# Altium PCB Copy of DAQ.PcbDoc (part 1 of 2)
Units mil, origin at the board's own origin, x right, y up, seen from the top; angles counter-clockwise.
Board outline 2793.12 x 2548.73 mil, 4 copper layers (Top Layer, GND, 3V3, Bottom Layer), stack 23.756 mil thick; 148 components, 93 nets, 486 pads, 25 vias.
Unrouted connection lines stored in the file: 356.
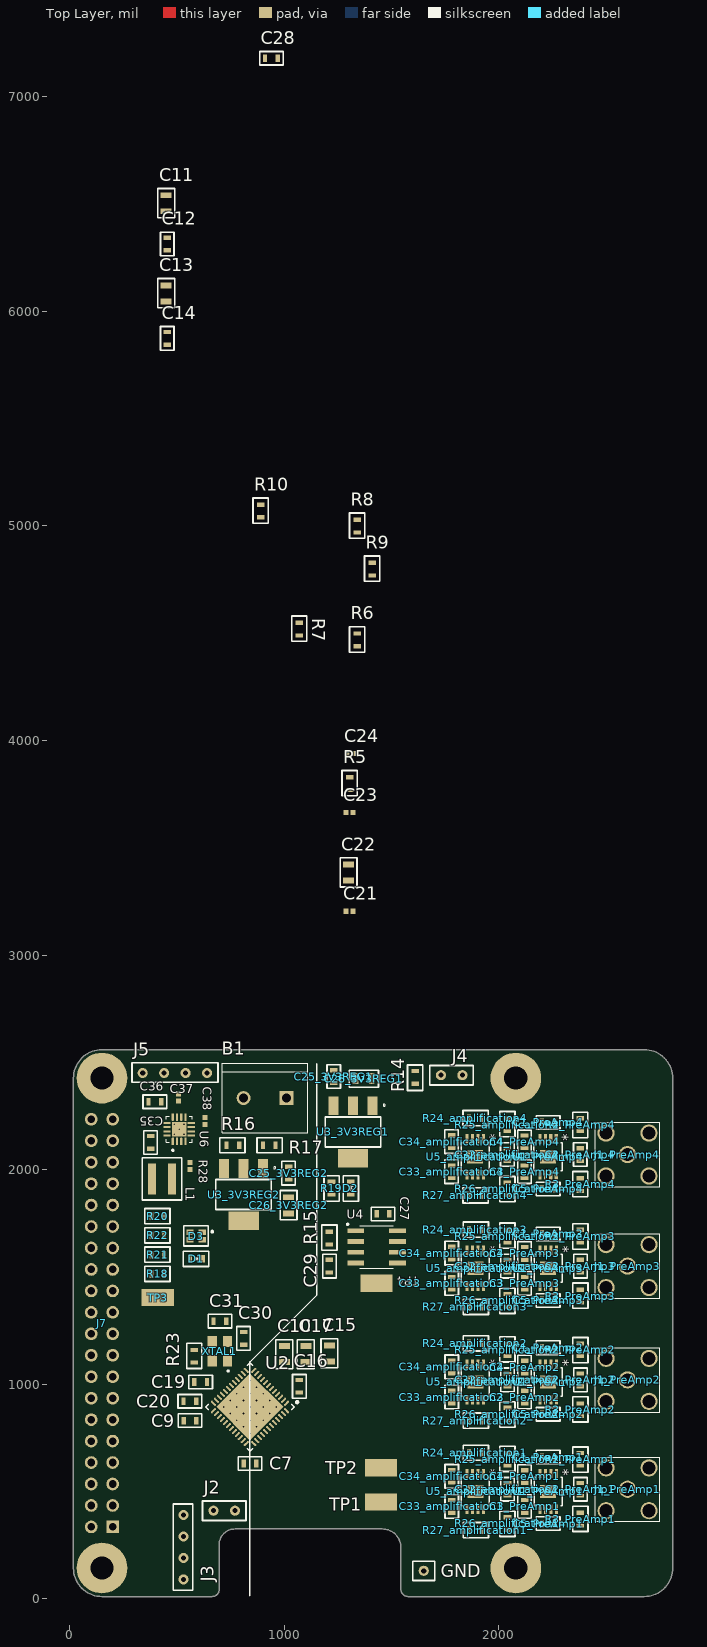
[diagram p0: Top Layer view]
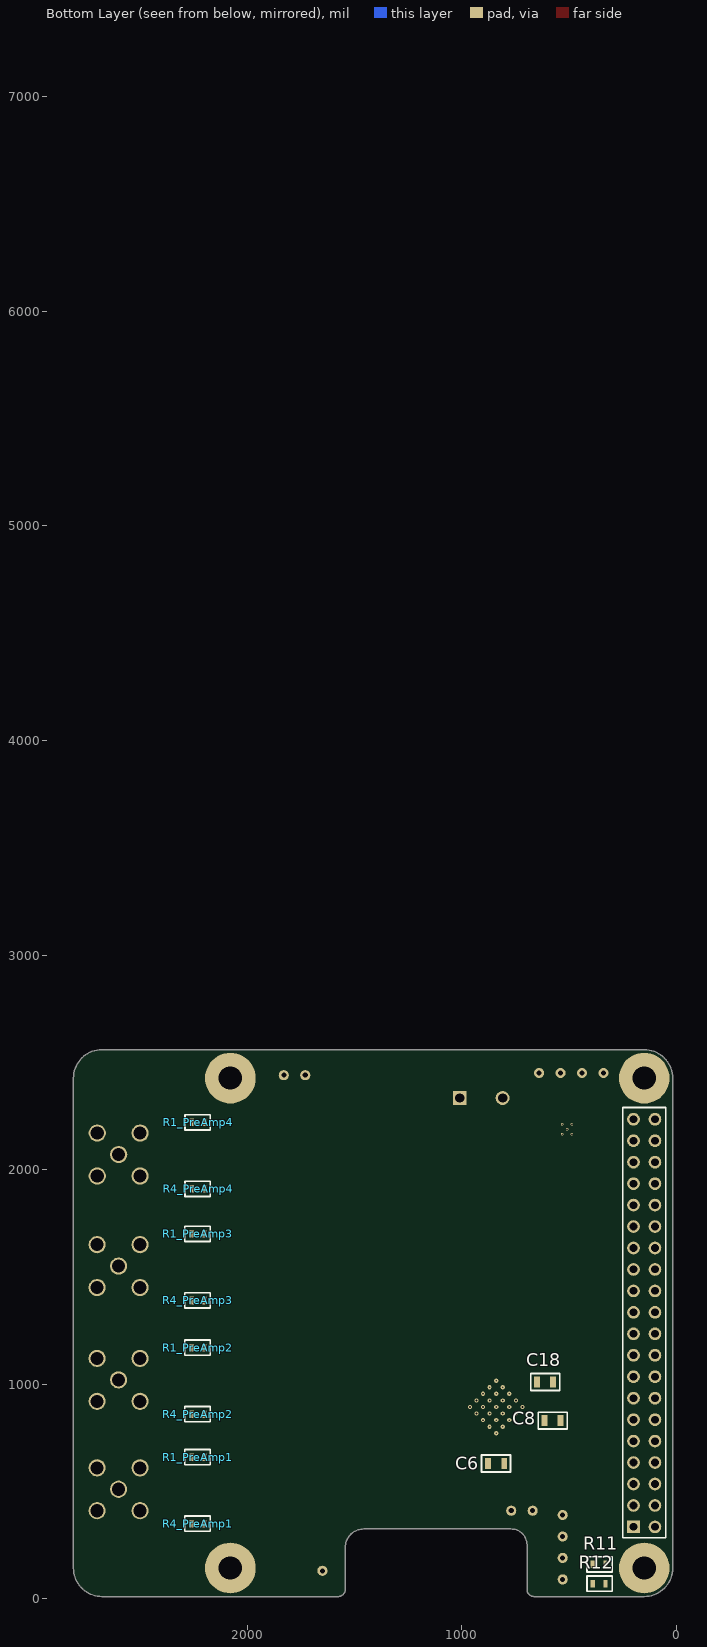
[diagram p1: Bottom Layer view, seen from below]
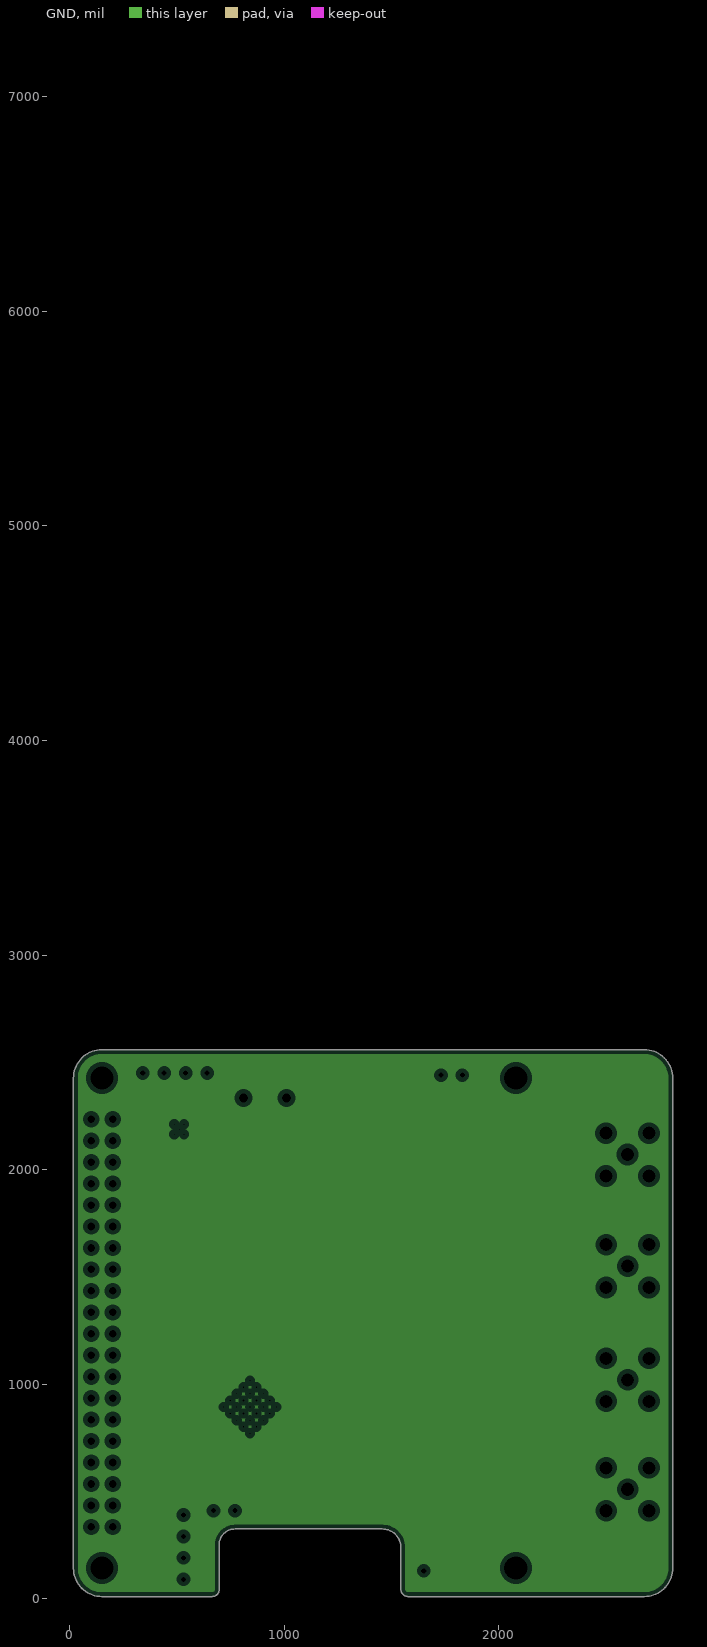
[diagram p2: GND, clearances drawn from the general rule]
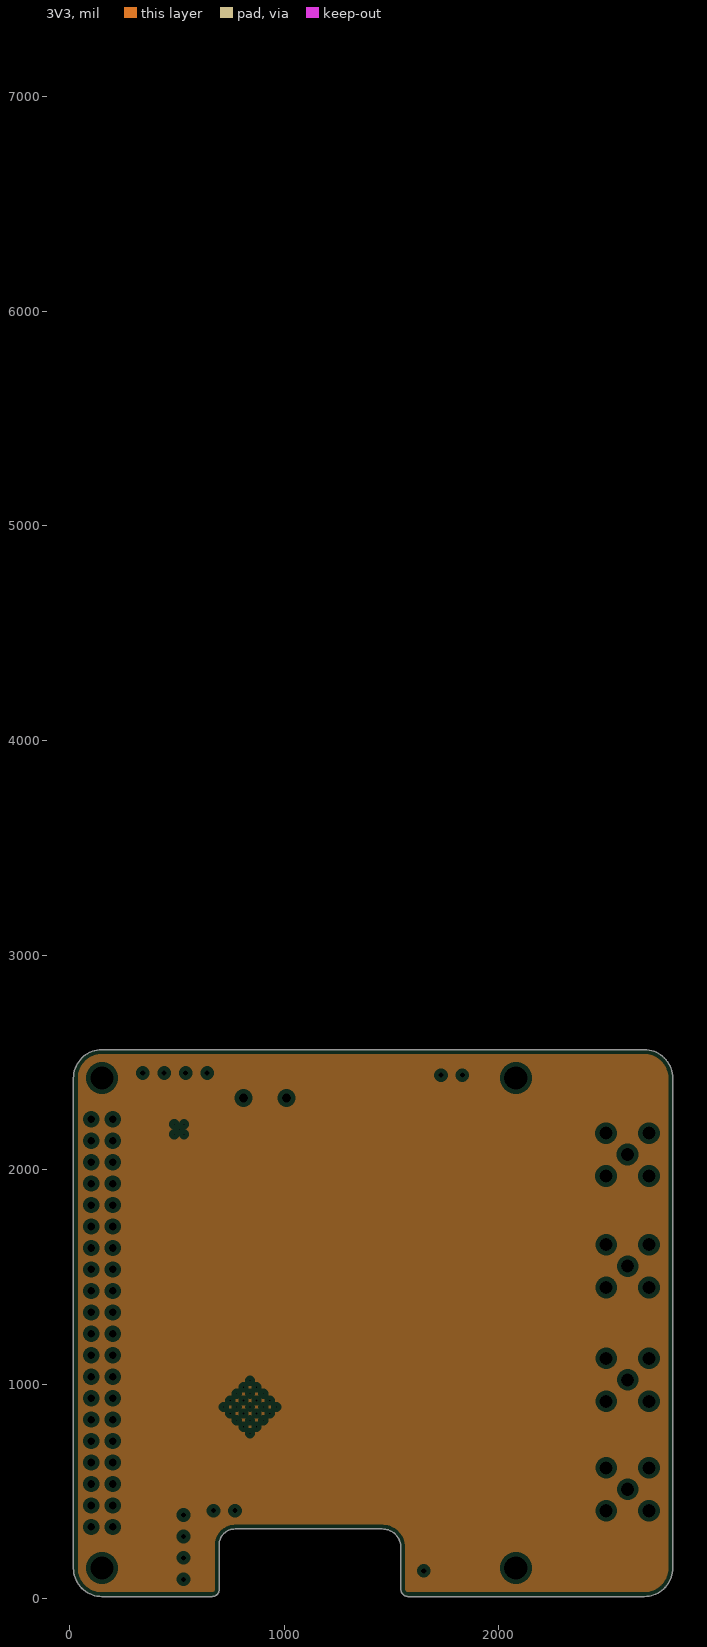
[diagram p3: 3V3, clearances drawn from the general rule]

## Layer stack, top to bottom
Top Solder: solder mask 0.4, Solder Resist, Dk 3.5
Top Layer: signal copper 1.4
Dielectric 2: prepreg 2.8, PP-006, Dk 4.1
GND: plane copper 1.378
Dielectric 1: dielectric 12.6, FR-4, Dk 4.8
3V3: plane copper 1.378
Dielectric 3: prepreg 2.8, PP-006, Dk 4.1
Bottom Layer: signal copper 1.4
Bottom Solder: solder mask 0.4, Solder Resist, Dk 3.5

## Board outline
149.97,10.02 cw(c150,5) 150,10.02 664.86,10.02 ccw(c663.52,42.85) 696.39,42.85 ccw(c663.52,42.85) 696.37,44.07 ccw(c663.52,42.85) 696.37,44.1 696.37,44.07 cw(c701.38,44.29) 696.36,44.29 696.36,251.97 cw(c701.38,251.97) 696.36,252.04 cw(c770.28,250.98) 771.29,324.9 cw(c770.28,250.98) 771.33,324.9 771.26,324.9 1457.28,324.9 cw(c1457.28,239.17) 1543.01,239.17 1543.01,45.28 cw(c1537.99,45.28) 1543,45.13 ccw(c1577.43,44.33) 1574.61,10.02 2676.77,10.02 cw(c2676.77,5) 2677.17,10 cw(c2677.56,5) 2677.56,10.02 ccw(c2677.56,142.8) 2810.34,142.8 2810.34,2426.27 ccw(c2677.72,2426.1) 2810.34,2426.29 ccw(c2677.72,2426.1) 2678.18,2558.72 ccw(c2677.72,2426.1) 2677.57,2558.73 2678.18,2558.72 150,2558.73 cw(c150,2563.74) 149.96,2558.73 cw(c149.84,2426.1) 149.99,2558.73 149.96,2558.73 ccw(c149.84,2426.1) 17.22,2426.29 ccw(c149.84,2426.1) 17.22,2426.27 ccw(c149.84,2426.1) 17.22,2426.25 17.22,2426.26 ccw(c12.2,2426.26) 17.22,2426.29 17.22,2426.27 17.22,142.8 ccw(c150,142.8)

## Design rules (kind name [scope] priority, off if disabled: settings)
Clearance [All] p1: gap=10 ignorepadtopadclearanceinfootprint=FALSE except(0: Arc-Hole Track-Hole SMDPad-Hole THPad-Hole Via-Hole Fill-Hole Poly-Hole Region-Hole Text-Hole)
PlaneClearance [All] p1: clearance=20
PlaneConnect [All] p1: planeconnectstyle=Relief reliefexpansion=20 reliefentries=4 reliefconductorwidth=10 reliefairgap=10
PolygonConnect [All] p1: connectstyle=Relief reliefconductorwidth=10 reliefentries=4 polygonreliefangle="90 Angle" airgapwidth=10
RoomDefinition A_CH_1 [InComponentClass('Room Definition 5')] p1: confinementstyle=ConfineIn formatcopy=TRUE lockcomponents=FALSE outline 1730,270 3070,270 3070,730 1730,730
RoomDefinition A_CH_2 [InComponentClass('Room Definition 3')] p2: confinementstyle=ConfineIn formatcopy=TRUE lockcomponents=FALSE outline 1730.47,780 3070,780 3070,1240 1730.47,1240
RoomDefinition A_CH_4 [InComponentClass('Room Definition 2')] p3: confinementstyle=ConfineIn formatcopy=TRUE lockcomponents=FALSE outline 1730,1830 3069.53,1830 3069.53,2290 1730,2290
RoomDefinition A_CH_3 [InComponentClass('Room Definition 1')] p4: confinementstyle=ConfineIn formatcopy=TRUE lockcomponents=FALSE outline 1730.47,1310 3070,1310 3070,1770 1730.47,1770
RoomDefinition U_5V_Switch [InComponentClass('U_5V_Switch')] p5: confinementstyle=ConfineIn formatcopy=TRUE lockcomponents=FALSE outline 310,2383.04 310,1833.04 650,1833.04 650,2383.04
RoutingVias [All] p1: holewidth=28 width=50 viastyle="Through Hole" minholewidth=28 minwidth=50 maxholewidth=28 maxwidth=50
SolderMaskExpansion [All] p1: expansion=4
Width [All] p1: maxlimit=10 minlimit=10 preferedwidth=10
28 further rules are at their usual default settings.

## Classes and differential pairs
component class "Room Definition 5": C1_PreAmp1 C2_PreAmp1 C3_PreAmp1 C4_PreAmp1 C5_PreAmp1 C32_amplification1 C33_amplification1 C34_amplification1 J1_PreAmp1 R1_PreAmp1 R2_PreAmp1 R3_PreAmp1 R4_PreAmp1 R24_amplification1 R25_amplification1 R26_amplification1 R27_amplification1 U1_PreAmp1 U5_amplification1
component class "Room Definition 4": C1_PreAmp1 C2_PreAmp1 C3_PreAmp1 C4_PreAmp1 C5_PreAmp1 C32_amplification1 C33_amplification1 C34_amplification1 J1_PreAmp1 R1_PreAmp1 R2_PreAmp1 R3_PreAmp1 R4_PreAmp1 R24_amplification1 R25_amplification1 R26_amplification1 R27_amplification1 TP1 TP2 U1_PreAmp1 U5_amplification1
component class "Room Definition 3": C1_PreAmp2 C2_PreAmp2 C3_PreAmp2 C4_PreAmp2 C5_PreAmp2 C32_amplification2 C33_amplification2 C34_amplification2 J1_PreAmp2 R1_PreAmp2 R2_PreAmp2 R3_PreAmp2 R4_PreAmp2 R24_amplification2 R25_amplification2 R26_amplification2 R27_amplification2 U1_PreAmp2 U5_amplification2
component class "Room Definition 2": C1_PreAmp4 C2_PreAmp4 C3_PreAmp4 C4_PreAmp4 C5_PreAmp4 C32_amplification4 C33_amplification4 C34_amplification4 J1_PreAmp4 R1_PreAmp4 R2_PreAmp4 R3_PreAmp4 R4_PreAmp4 R24_amplification4 R25_amplification4 R26_amplification4 R27_amplification4 U1_PreAmp4 U5_amplification4
component class "Room Definition 1": C1_PreAmp3 C2_PreAmp3 C3_PreAmp3 C4_PreAmp3 C5_PreAmp3 C32_amplification3 C33_amplification3 C34_amplification3 J1_PreAmp3 R1_PreAmp3 R2_PreAmp3 R3_PreAmp3 R4_PreAmp3 R24_amplification3 R25_amplification3 R26_amplification3 R27_amplification3 U1_PreAmp3 U5_amplification3
channel class Preamp: PreAmp1 PreAmp2 PreAmp3 PreAmp4
channel class "Analog Channel": ANALOG1 ANALOG2 ANALOG3 ANALOG4
channel class amplification: amplification1 amplification2 amplification3 amplification4
channel class 3V3Supply: 3V3REG1 3V3REG2
net class GPIO[2..6]: GPIO2 GPIO3 GPIO4 GPIO5 GPIO6 GPIO12 GPIO13 GPIO16 GPIO26
net class AINP[1..4]: AINP1 AINP2 AINP3 AINP4
net class AINN[1..4]: AINN1 AINN2 AINN3 AINN4
net class ADC_DATA[0..7]: ADC_DATA0 ADC_DATA1 ADC_DATA2 ADC_DATA3 ADC_DATA4 ADC_DATA5 ADC_DATA6 ADC_DATA7
component class U_5V_Switch: C35 C36 C37 C38 L1 R28 U6

## Components (designator, comment, footprint, x,y, rotation, side; value= is the part's Value field where it differs from the comment)
B1 "9V" *TE_282837-2 910,2333.5 r180 top
C1_PreAmp1 "330pF" C0603 2230,660 r180 top (schematic designator C1)
C1_PreAmp2 "330pF" C0603 2230,1170 r180 top (schematic designator C1)
C1_PreAmp3 "330pF" C0603 2230,1700 r180 top (schematic designator C1)
C1_PreAmp4 "330pF" C0603 2229.53,2220 r180 top (schematic designator C1)
C2_PreAmp1 ".1uF" C0603 2380,510 r90 top (schematic designator C2)
C2_PreAmp2 ".1uF" C0603 2380,1020 r90 top (schematic designator C2)
C2_PreAmp3 ".1uF" C0603 2380,1550 r90 top (schematic designator C2)
C2_PreAmp4 ".1uF" C0603 2379.53,2070 r90 top (schematic designator C2)
C3_PreAmp1 "2.2uF" C0603 2120,430 r270 top (schematic designator C3)
C3_PreAmp2 "2.2uF" C0603 2120,940 r270 top (schematic designator C3)
C3_PreAmp3 "2.2uF" C0603 2120,1470 r270 top (schematic designator C3)
C3_PreAmp4 "2.2uF" C0603 2119.53,1990 r270 top (schematic designator C3)
C4_PreAmp1 ".1uF" C0603 2120,569.53 r90 top (schematic designator C4)
C4_PreAmp2 ".1uF" C0603 2120,1079.53 r90 top (schematic designator C4)
C4_PreAmp3 ".1uF" C0603 2120,1609.53 r90 top (schematic designator C4)
C4_PreAmp4 ".1uF" C0603 2119.53,2129.53 r90 top (schematic designator C4)
C5_PreAmp1 "330pF" C0603 2230,350 r180 top (schematic designator C5)
C5_PreAmp2 "330pF" C0603 2230,860 r180 top (schematic designator C5)
C5_PreAmp3 "330pF" C0603 2230,1390 r180 top (schematic designator C5)
C5_PreAmp4 "330pF" C0603 2229.53,1910 r180 top (schematic designator C5)
C6 "10uF" C0805 840,630 r180 bottom
C7 ".1uF" C0603 840,630 r0 top
C8 "10uF" C0805 577.4,830 r0 bottom
C9 ".1uF" C0603 560.47,830 r0 top
C10 ".47uF" C0805 1000,1140 r90 top
C11 "10uF" C0805 449.37,6504.06 r270 top
C12 ".1uF" C0603 454.37,6314.06 r270 top
C13 "10uF" C0805 449.37,6084.06 r270 top
C14 ".1uF" C0603 454.37,5874.06 r270 top
C15 "10uF" C0805 1210,1142.6 r270 top
C16 ".1uF" C0603 1070,990 r270 top
C17 ".47uF" C0805 1100,1140 r90 top
C18 "10uF" C0805 612.6,1010 r0 bottom
C19 ".1uF" C0603 610,1010 r0 top
C20 ".1uF" C0603 560,920 r0 top
C21 "5.6nF" C0402 1304.37,3204.06 r0 top
C22 "10uF" C0805 1299.37,3384.06 r270 top
C23 "390pF" c0402 1304.37,3664.06 r0 top
C24 ".1uF" C0402 1309.37,3939.06 r0 top
C25_3V3REG1 ".1uF" C0603 1230,2433.5 r270 top (schematic designator C25)
C25_3V3REG2 ".1uF" C0603 1020,1983.5 r90 top (schematic designator C25)
C26_3V3REG1 "10uF" C0805 1370,2423.5 r180 top (schematic designator C26)
C26_3V3REG2 "10uF" C0805 1020,1833.5 r270 top (schematic designator C26)
C27 ".1uF" C0603 1460,1793.5 r180 top
C28 ".1uF" C0603 940,7180 r0 top
C29 ".1uF" C0603 1210,1550 r90 top
C30 "18pF" C0603 810,1213.5 r270 top
C31 "18pF" C0603 700,1293.5 r180 top
C32_amplification1 ".1uF" C0603 2040,510 r90 top (schematic designator C32)
C32_amplification2 ".1uF" C0603 2040,1020 r90 top (schematic designator C32)
C32_amplification3 ".1uF" C0603 2040,1550 r90 top (schematic designator C32)
C32_amplification4 ".1uF" C0603 2039.53,2070 r90 top (schematic designator C32)
C33_amplification1 "2.2uF" C0603 1780,430 r270 top (schematic designator C33)
C33_amplification2 "2.2uF" C0603 1780,940 r270 top (schematic designator C33)
C33_amplification3 "2.2uF" C0603 1780,1470 r270 top (schematic designator C33)
C33_amplification4 "2.2uF" C0603 1779.53,1990 r270 top (schematic designator C33)
C34_amplification1 ".1uF" C0603 1780,570.47 r90 top (schematic designator C34)
C34_amplification2 ".1uF" C0603 1780,1080.47 r90 top (schematic designator C34)
C34_amplification3 ".1uF" C0603 1780,1610.47 r90 top (schematic designator C34)
C34_amplification4 ".1uF" C0603 1779.53,2130.47 r90 top (schematic designator C34)
C35 "22uF" C0603 376.65,2126.54 r270 top
C36 "10uF" C0603 396.65,2316.54 r0 top
C37 ".1uF" C0402 506.65,2336.54 r270 top
C38 "620pF" C0402 630,2226.54 r90 top
D1 "GREEN LED" LTST-C191KGKT_green_0603 590,1583.5 r0 top
D2 "GREEN LED" LTST-C191KGKT_green_0603 1310,1913.5 r90 top
D3 "RGB LED" rgb_led_LTST-C19HE1WT 617.09,1706.96 r270 top
GND "Comment" HEADERPINS_1x1 1650,130 r0 top
J1_PreAmp1 "J" hydrophones_sma_conn 2600,510 r90 top (schematic designator J1)
J1_PreAmp2 "J" hydrophones_sma_conn 2600,1020 r90 top (schematic designator J1)
J1_PreAmp3 "J" hydrophones_sma_conn 2600,1550 r90 top (schematic designator J1)
J1_PreAmp4 "J" hydrophones_sma_conn 2599.53,2070 r90 top (schematic designator J1)
J2 "2pin header" HEADERPINS_2x1 618,364 r0 top
J3 "AUX_JUMPER" headerPins_4x1 530,390 r270 top
J4 "2pin header" HEADERPINS_2x1 1678,2394 r0 top
J5 "AUX_JUMPER" headerPins_4x1 640,2450 r180 top
J7 "RasPi" RPI 150,1284.53 r270 top locked
L1 "2.2uH" 74438357022 430,1956.54 r180 top
R1_PreAmp1 "1M" R0603 2230,660 r180 bottom (schematic designator R1)
R1_PreAmp2 "1M" R0603 2230,1170 r180 bottom (schematic designator R1)
R1_PreAmp3 "1M" R0603 2230,1700 r180 bottom (schematic designator R1)
R1_PreAmp4 "1M" R0603 2229.53,2220 r180 bottom (schematic designator R1)
R2_PreAmp1 "330" R0603 2380,650 r90 top (schematic designator R2)
R2_PreAmp2 "330" R0603 2380,1160 r90 top (schematic designator R2)
R2_PreAmp3 "330" R0603 2380,1690 r90 top (schematic designator R2)
R2_PreAmp4 "330" R0603 2379.53,2210 r90 top (schematic designator R2)
R3_PreAmp1 "330" R0603 2380,370.47 r270 top (schematic designator R3)
R3_PreAmp2 "330" R0603 2380,880.47 r270 top (schematic designator R3)
R3_PreAmp3 "330" R0603 2380,1410.47 r270 top (schematic designator R3)
R3_PreAmp4 "330" R0603 2379.53,1930.47 r270 top (schematic designator R3)
R4_PreAmp1 "1M" R0603 2230,350 r180 bottom (schematic designator R4)
R4_PreAmp2 "1M" R0603 2230,860 r180 bottom (schematic designator R4)
R4_PreAmp3 "1M" R0603 2230,1390 r180 bottom (schematic designator R4)
R4_PreAmp4 "1M" R0603 2229.53,1910 r180 bottom (schematic designator R4)
R5 "10K" R0603 1304.37,3799.06 r270 top
R6 "1K" R0603 1339.37,4469.06 r270 top
R7 "10K" R0603 1069.37,4519.06 r270 top
R8 "10K" R0603 1339.37,4999.06 r270 top
R9 "10K" R0603 1409.37,4799.06 r270 top
R10 "10K" R0603 889.37,5069.53 r270 top
R11 "2K" R0603 360,160 r0 bottom
R12 "2K" R0603 360,70 r0 bottom
R14 "10K" R0603 1610,2430 r90 top
R15 "150k" R0603 1210,1680.47 r270 top
R16 "20k" R0603 760,2113.5 r0 top
R17 "10k" R0603 930,2113.5 r180 top
R18 "64.9" R0603 410,1513.5 r0 top
R19 "64.9" R0603 1220,1913.5 r90 top
R20 "64.9" R0603 410,1783.5 r0 top
R21 "64.9" R0603 410,1603.5 r0 top
R22 "64.9" R0603 410,1693.5 r0 top
R23 "121" R0603 580,1130 r270 top
R24_amplification1 "150k" R0603 1890.47,680 r180 top (schematic designator R24)
R24_amplification2 "150k" R0603 1890.47,1190 r180 top (schematic designator R24)
R24_amplification3 "150k" R0603 1890.47,1720 r180 top (schematic designator R24)
R24_amplification4 "150k" R0603 1890,2240 r180 top (schematic designator R24)
R25_amplification1 "10k" R0603 2040,650 r270 top (schematic designator R25)
R25_amplification2 "10k" R0603 2040,1160 r270 top (schematic designator R25)
R25_amplification3 "10k" R0603 2040,1690 r270 top (schematic designator R25)
R25_amplification4 "10k" R0603 2039.53,2210 r270 top (schematic designator R25)
R26_amplification1 "10k" R0603 2040,350.47 r90 top (schematic designator R26)
R26_amplification2 "10k" R0603 2040,860.47 r90 top (schematic designator R26)
R26_amplification3 "10k" R0603 2040,1390.47 r90 top (schematic designator R26)
R26_amplification4 "10k" R0603 2039.53,1910.47 r90 top (schematic designator R26)
R27_amplification1 "150k" R0603 1890.47,320 r180 top (schematic designator R27)
R27_amplification2 "150k" R0603 1890.47,830 r180 top (schematic designator R27)
R27_amplification3 "150k" R0603 1890.47,1360 r180 top (schematic designator R27)
R27_amplification4 "150k" R0603 1890,1880 r180 top (schematic designator R27)
R28 "100K" C0402 560,2016.54 r90 top
TP1 "TP" TP_5029 1450,450 r90 top
TP2 "TP" TP_5029 1450,610 r90 top
TP3 "TP" TP_5029 410,1403.5 r90 top
TP4 "TP" TP_5029 1430,1470 r90 top
U1_PreAmp1 "THS4121" DGN8_1P89X1P57-L 2230,500 r270 top (schematic designator U1)
U1_PreAmp2 "THS4121" DGN8_1P89X1P57-L 2230,1010 r270 top (schematic designator U1)
U1_PreAmp3 "THS4121" DGN8_1P89X1P57-L 2230,1540 r270 top (schematic designator U1)
U1_PreAmp4 "THS4121" DGN8_1P89X1P57-L 2229.53,2060 r270 top (schematic designator U1)
U2 "ADAR7251WBCSZ" ADI-CS-48-1_L 840,893.5 r225 top
U3_3V3REG1 "3V3Reg" *SOT223 1320,2175.51 r270 top (schematic designator U3)
U3_3V3REG2 "3V3Reg" *SOT223 810,1883.5 r270 top (schematic designator U3)
U4 "OPA2325" *SOIC127P600X175-8N 1430,1640 r0 top
U5_amplification1 "THS4121" DGN8_1P89X1P57-L 1890,500 r270 top (schematic designator U5)
U5_amplification2 "THS4121" DGN8_1P89X1P57-L 1890,1010 r270 top (schematic designator U5)
U5_amplification3 "THS4121" DGN8_1P89X1P57-L 1890,1540 r270 top (schematic designator U5)
U5_amplification4 "THS4121" DGN8_1P89X1P57-L 1889.53,2060 r270 top (schematic designator U5)
U6 "TPS62133AQRGTRQ1" QFN50P300X300X100-17N 509.84,2188.03 r90 top
XTAL1 "ECS-192-12-33-AGM-TR" XTAL_ECS-192-12-33-AGM-TR 700,1153.5 r90 top

## Footprints (in the part's own frame and the unit in brackets; to place one, negate y for a bottom-side part, rotate by r counter-clockwise, add the part's x,y. Pads: shape width x height; smd on the part's side, far side on the other; paste and mask are expansions set on the pad)
74438357022 [mm]
  rect 0.98x3.7 smd: 1(-1.185,0) 2(1.185,0)
  silkscreen extent -2.32,-2.5 2.33,2.5
*SOIC127P600X175-8N [mm]
  rect 1.97x0.57 smd: 1(-2.475,1.905) 2(-2.475,0.635) 3(-2.475,-0.635) 4(-2.475,-1.905) 5(2.475,-1.905) 6(2.475,-0.635) 7(2.475,0.635) 8(2.475,1.905)
  silkscreen extent -3.53,-2.51 2,2.77, body extent -3.1,-2.5 3.1,2.5, height 1.77
*SOT223 [mil]
  rect 88x48 smd: 1(-122,91) 2(-122,0) 3(-122,-91)
  rect 86.61x141.73 smd: 4(122.01,0)
  silkscreen extent -130,-129 70,150, body extent -143,-132 144,132, height 72
*TE_282837-2 [mm]
  rect 1.65x1.65 hole 1.1: 1(-2.54,0)
  round 1.65 hole 1.1: 2(2.54,0)
  silkscreen extent -5.08,-4.1 5.08,4.1, body extent -5.68,-4.1 5.08,4.1, height 10.01
ADI-CS-48-1_L [mm] "QFN, 48-Leads, Body 7.1x7.1mm, Pitch 0.5mm, Thermal Pad 5.6x5.6mm, IPC High Density"
  oval 0.75x0.25 smd: 1(-3.375,2.75) 2(-3.375,2.25) 3(-3.375,1.75) 4(-3.375,1.25) 5(-3.375,0.75) 6(-3.375,0.25) 7(-3.375,-0.25) 8(-3.375,-0.75) 9(-3.375,-1.25) 10(-3.375,-1.75) 11(-3.375,-2.25) 12(-3.375,-2.75) 25(3.375,-2.75) 26(3.375,-2.25) 27(3.375,-1.75) 28(3.375,-1.25) 29(3.375,-0.75) 30(3.375,-0.25) 31(3.375,0.25) 32(3.375,0.75) 33(3.375,1.25) 34(3.375,1.75) 35(3.375,2.25) 36(3.375,2.75)
  oval 0.25x0.75 smd: 13(-2.75,-3.375) 14(-2.25,-3.375) 15(-1.75,-3.375) 16(-1.25,-3.375) 17(-0.75,-3.375) 18(-0.25,-3.375) 19(0.25,-3.375) 20(0.75,-3.375) 21(1.25,-3.375) 22(1.75,-3.375) 23(2.25,-3.375) 24(2.75,-3.375) 37(2.75,3.375) 38(2.25,3.375) 39(1.75,3.375) 40(1.25,3.375) 41(0.75,3.375) 42(0.25,3.375) 43(-0.25,3.375) 44(-0.75,3.375) 45(-1.25,3.375) 46(-1.75,3.375) 47(-2.25,3.375) 48(-2.75,3.375)
  rect 5.6x5.6 smd: 49(0,0)
  silkscreen extent -4.47,-3.7 3.7,3.7, body extent -3.5,-3.5 3.5,3.5, height 0.8
C0402 [mm]
  rect 0.59x0.63 smd: 1(-0.42,0) 2(0.42,0)
  body extent -0.5,-0.28 0.5,0.28, height 0.51
c0402 [mm]
  rect 0.59x0.63 smd: 1(-0.42,0) 2(0.42,0)
  body extent -0.5,-0.28 0.5,0.28, height 0.51
C0603 [mm]
  rect 0.5x0.9 smd: 1(-0.75,0) 2(0.75,0)
  silkscreen extent -1.4,-0.8 1.4,0.8, body extent -0.8,-0.4 0.8,0.4, height 0.81
C0805 [mm]
  rect 0.7x1.3 smd: 1(-0.95,0) 2(0.95,0)
  silkscreen extent -1.75,-1 1.7,1, body extent -1,-0.62 1,0.63, height 0.61
DGN8_1P89X1P57-L [mil]
  rect 44x15 smd paste+0 mask+0: 1(-83.5,38.39) 2(-83.5,12.8) 3(-83.5,-12.8) 4(-83.5,-38.39) 5(83.5,-38.39) 6(83.5,-12.8) 7(83.5,12.8) 8(83.5,38.39)
  rect 61.81x74.41 smd paste-36.7 mask+0: EPAD(0,0)
  silkscreen extent -66,-66 66,66, body extent -98,-61 100,61, height 46
HEADERPINS_1x1 [mm]
  round 1.2 hole 0.6: 1(0,0)
  silkscreen extent -1.31,-1.15 1.3,1.15
HEADERPINS_2x1 [mm]
  round 1.2 hole 0.6: 1(1.321,1.168) 2(3.861,1.168)
  silkscreen extent 0.01,0.01 5.16,2.31
headerPins_4x1 [mm]
  round 1.2 hole 0.6: 1(0,0) 2(2.54,0) 3(5.08,0) 4(7.62,0)
  silkscreen extent -1.3,-1.2 8.9,1.1
hydrophones_sma_conn [mil]
  round 80 hole 61: 1(0,0) 2(-100,-100) 2(-100,100) 2(100,-100) 2(100,100)
  silkscreen extent -150,-150 150,150, body extent -125,-457 125,126, height 377
LTST-C191KGKT_green_0603 [mm]
  rect 0.5x0.9 smd: 1(-0.75,0) 2(0.75,0)
  silkscreen extent -1.55,-0.9 1.45,0.9, body extent -0.8,-0.4 0.8,0.4, height 0.81
QFN50P300X300X100-17N [mm]
  rrect25% 0.86x0.26 smd: 1(-1.435,0.75) 2(-1.435,0.25) 3(-1.435,-0.25) 4(-1.435,-0.75) 9(1.435,-0.75) 10(1.435,-0.25) 11(1.435,0.25) 12(1.435,0.75)
  rrect25% 0.26x0.86 smd: 5(-0.75,-1.435) 6(-0.25,-1.435) 7(0.25,-1.435) 8(0.75,-1.435) 13(0.75,1.435) 14(0.25,1.435) 15(-0.25,1.435) 16(-0.75,1.435)
  rect 1.68x1.68 smd paste-2: 17(0,0)
  round 0.3 hole 0.2: 17_1(0,0) 17_2(0.58,0.58) 17_3(0.58,-0.58) 17_4(-0.58,-0.58) 17_5(-0.58,0.58)
  silkscreen extent -2.59,-1.55 1.55,1.55
R0603 [mm]
  rect 0.5x0.9 smd: 1(-0.75,0) 2(0.75,0)
  silkscreen extent -1.55,-0.9 1.45,0.9, body extent -0.8,-0.4 0.8,0.4, height 0.46
rgb_led_LTST-C19HE1WT [mm]
  rect 0.65x0.85 smd: 1(0,0) 2(0.85,0) 3(0.85,-1.45) 4(0,-1.45)
  silkscreen extent -0.8,-2.17 1.6,1.3, body extent -0.38,-1.52 2.4,0.08, height 0.36
RPI [mm]
  rect 1.5x1.5 hole 0.9: 1(24.13,1.27)
  round 1.5 hole 0.9: 2(24.13,-1.27) 3(21.59,1.27) 4(21.59,-1.27) 5(19.05,1.27) 6(19.05,-1.27) 7(16.51,1.27) 8(16.51,-1.27) 9(13.97,1.27) 10(13.97,-1.27) 11(11.43,1.27) 12(11.43,-1.27) 13(8.89,1.27) 14(8.89,-1.27) 15(6.35,1.27) 16(6.35,-1.27) 17(3.81,1.27) 18(3.81,-1.27) 19(1.27,1.27) 20(1.27,-1.27) 21(-1.27,1.27) 22(-1.27,-1.27) 23(-3.81,1.27) 24(-3.81,-1.27) 25(-6.35,1.27) 26(-6.35,-1.27) 27(-8.89,1.27) 28(-8.89,-1.27) 29(-11.43,1.27) 30(-11.43,-1.27) 31(-13.97,1.27) 32(-13.97,-1.27) 33(-16.51,1.27) 34(-16.51,-1.27) 35(-19.05,1.27) 36(-19.05,-1.27) 37(-21.59,1.27) 38(-21.59,-1.27) 39(-24.13,1.27) 40(-24.13,-1.27)
  body extent -25.65,-2.54 25.65,2.54, height 11.06
TP_5029 [mil]
  rect 80x150 smd: 1(0,0)
XTAL_ECS-192-12-33-AGM-TR [mm]
  rect 1.3x1.1 smd: 1(-1.15,-0.9) 2(1.15,-0.9) 3(1.15,0.9) 4(-1.15,0.9)
  silkscreen extent -2.45,-1.25 0.27,1.25, body extent -1.6,-1.26 1.6,1.24, height 0.81

## Part data
B1: library part "9V_BAT_conn_ 282837-2"
C1_PreAmp1 C1_PreAmp2 C1_PreAmp3 C1_PreAmp4 C5_PreAmp1 C5_PreAmp2 C5_PreAmp3 C5_PreAmp4: library part CC0603KRX7R9BB331, "CAP CER 330PF 50V X7R 0603", Case/Package=0603, Case Code (Metric)=1608, Dielectric=X7R, Insulation Resistance=10GR, Manufacturer 1=Yageo, Max Operating Temperature=125°C, Min Operating Temperature=-55°C, Package Quantity=1, Tolerance=10%, Voltage Rating=50V, Capacitance=330pF, Case Code (Imperial)=0603, ComponentLink1Description=https://datasheet.ciiva.com/8033/1489800-8033879.pdf?src-supplier=Element14, ComponentLink1URL=https://datasheet.ciiva.com/8033/1489800-8033879.pdf?src-supplier=Element14, ComponentLink2Description=https://datasheet.ciiva.com/17434/upy-gphc-x7r-6-3v-to-50v-8-17434663.pdf?src-supplier=Avnet+Europe, ComponentLink2URL=https://datasheet.ciiva.com/17434/upy-gphc-x7r-6-3v-to-50v-8-17434663.pdf?src-supplier=Avnet+Europe, ComponentLink3Description=https://datasheet.ciiva.com/144/mlccorderingcode-144456.pdf?src-supplier=Digi-Key, ComponentLink3URL=https://datasheet.ciiva.com/144/mlccorderingcode-144456.pdf?src-supplier=Digi-Key, ComponentLink4Description=https://datasheet.ciiva.com/144/mlccorderingcode-144454.pdf?src-supplier=Digi-Key, ComponentLink4URL=https://datasheet.ciiva.com/144/mlccorderingcode-144454.pdf?src-supplier=Digi-Key, ComponentLink5Description=https://datasheet.ciiva.com/144/mlccorderingcode-144455.pdf?src-supplier=Digi-Key, ComponentLink5URL=https://datasheet.ciiva.com/144/mlccorderingcode-144455.pdf?src-supplier=Digi-Key, ComponentLink6Description=https://datasheet.ciiva.com/11465/upy-gphc-x7r-6-3v-to-50v-8-11465240.pdf?src-supplier=Avnet, ComponentLink6URL=https://datasheet.ciiva.com/11465/upy-gphc-x7r-6-3v-to-50v-8-11465240.pdf?src-supplier=Avnet, ComponentLink7Description=https://datasheet.ciiva.com/8033/1489800-8033881.pdf?src-supplier=Element14, ComponentLink7URL=https://datasheet.ciiva.com/8033/1489800-8033881.pdf?src-supplier=Element14, ComponentLink8Description=https://datasheet.ciiva.com/7978/1489800-7978174.pdf?src-supplier=Element14, ComponentLink8URL=https://datasheet.ciiva.com/7978/1489800-7978174.pdf?src-supplier=Element14, Composition=Ceramic, Depth=0.8mm, Dissipation Factor=2.5%, Halogen Free="Halogen Free", Height=0.8mm, Lead Free="Lead Free", Length=1.6mm, Manufacturer Part Number 1=CC0603KRX7R9BB331, Mount="Surface Mount", Packaging="Tape and Reel", Pricing 1="1=0.10000, 10=0.04700, 100=0.02100, 500=0.01498, 1000=0.01177 (USD)", Radiation Hardening=No, REACH SVHC=Unknown, RoHS=Yes, Stock 1=86035, Supplier 1=Digi-Key, Termination=SMD/SMT, Thickness=0.035inch, Voltage Rating (DC)=50V, Width=0.8mm
C2_PreAmp1 C2_PreAmp2 C2_PreAmp3 C2_PreAmp4 C4_PreAmp1 C4_PreAmp2 C4_PreAmp3 C4_PreAmp4 C7 C9 C12 C14 C16 C19 C20 C25_3V3REG1 C25_3V3REG2 C27 C32_amplification1 C32_amplification2 C32_amplification3 C32_amplification4 C34_amplification1 C34_amplification2 C34_amplification3 C34_amplification4: library part VJ0603Y104JXJCW1BC, "0603 0.1 uF 16 V ±5 % Tolerance X7R SMT Multilayer Ceramic Chip Capacitor", Capacitance=100nF, Case/Package=0603, Case Code (Metric)=1608, Dielectric=X7R, Dielectric Material=Tantalum, Manufacturer 1="Vishay Vitramon", Max Operating Temperature=125°C, Min Operating Temperature=-55°C, Package Quantity=4000, Supplier Part Number 1=720-1685-1-ND, Tolerance=5%, Voltage Rating=16V, Case Code (Imperial)=0603, ComponentLink1Description=https://datasheet.ciiva.com/5424/vjw1bcbascomseries-223529-5424533.pdf?src-supplier=Mouser, ComponentLink1URL=https://datasheet.ciiva.com/5424/vjw1bcbascomseries-223529-5424533.pdf?src-supplier=Mouser, ComponentLink2Description=https://datasheet.ciiva.com/11491/vjw1bcbascomseries-11491768.pdf?src-supplier=Avnet, ComponentLink2URL=https://datasheet.ciiva.com/11491/vjw1bcbascomseries-11491768.pdf?src-supplier=Avnet, ComponentLink3Description=https://datasheet.ciiva.com/16215/vjw1bcbascomseries-16215161.pdf?src-supplier=Future+Electronics, ComponentLink3URL=https://datasheet.ciiva.com/16215/vjw1bcbascomseries-16215161.pdf?src-supplier=Future+Electronics, Contact Plating=Tin,Matte, Depth=0.8mm, Height=0.95mm, Lead Free="Lead Free", Length=1.6mm, Manufacturer Part Number 1=VJ0603Y104JXJCW1BC, Mount="Surface Mount", Number of Pins=2, Packaging="Tape and Reel", Pricing 1="1=0.20000, 10=0.13400, 100=0.06780, 500=0.04636, 1000=0.04101 (USD)", RoHS=Yes, Stock 1=6936, Supplier 1=Digi-Key, Termination=SMD/SMT, Voltage Rating (DC)=16V, Width=0.8mm
C3_PreAmp1 C3_PreAmp2 C3_PreAmp3 C3_PreAmp4 C33_amplification1 C33_amplification2 C33_amplification3 C33_amplification4: library part VJ0603Y224KXJCW1BC, "Cap Ceramic 0.22uF 16V X7R 10% SMD 0603 125C Paper T/R", Capacitance=220nF, Case/Package=0603, Dielectric=X7R, Dielectric Material=Tantalum, Manufacturer 1="Vishay Vitramon", Max Operating Temperature=125°C, Min Operating Temperature=-55°C, Supplier Part Number 1=720-1853-1-ND, Tolerance=10%, Voltage Rating (DC)=16V, ComponentLink1Description=https://datasheet.ciiva.com/11490/vjw1bcbascomseries-11490982.pdf?src-supplier=Avnet, ComponentLink1URL=https://datasheet.ciiva.com/11490/vjw1bcbascomseries-11490982.pdf?src-supplier=Avnet, Depth=0.8mm, Lead Free="Lead Free", Length=1.6mm, Manufacturer Part Number 1=VJ0603Y224KXJCW1BC, Mount="Surface Mount", Packaging="Tape and Reel", Pricing 1="1=0.10000, 10=0.07000, 100=0.03100, 500=0.02214, 1000=0.01739 (USD)", RoHS=Yes, Stock 1=890490, Supplier 1=Digi-Key
C6 C8 C11 C13 C15 C18 C22 C26_3V3REG1 C26_3V3REG2: library part GCM21BR71A106KE22K, "CAP CER 10UF 10V X7R 0805", Case/Package=0805, Case Code (Metric)=2012, Dielectric=X7R, Manufacturer 1=Murata, Max Operating Temperature=125°C, Min Operating Temperature=-55°C, Package Quantity=10000, Ratings=AEC-Q200, Supplier Part Number 1=490-14531-1-ND, Tolerance=10%, Voltage Rating=10V, Capacitance=10uF, Case Code (Imperial)=0805, ComponentLink1Description=http://www.mouser.com/ds/2/281/c03e-806517.pdf?src-supplier=Mouser, ComponentLink1URL=http://www.mouser.com/ds/2/281/c03e-806517.pdf?src-supplier=Mouser, ComponentLink2Description=http://search.murata.co.jp/Ceramy/image/img/A01X/G101/ENG/GCM21BR71A106KE22-01.pdf?src-supplier=Digi-Key, ComponentLink2URL=http://search.murata.co.jp/Ceramy/image/img/A01X/G101/ENG/GCM21BR71A106KE22-01.pdf?src-supplier=Digi-Key, ComponentLink3Description=http://search.murata.co.jp/Ceramy/image/img/A01X/partnumbering_e_02.pdf?src-supplier=Digi-Key, ComponentLink3URL=http://search.murata.co.jp/Ceramy/image/img/A01X/partnumbering_e_02.pdf?src-supplier=Digi-Key, Height=1.25mm, Length=0.079inch, Manufacturer Part Number 1=GCM21BR71A106KE22K, Mount="Surface Mount", Packaging="Tape and Reel", Pricing 1="1=0.57000, 10=0.40300, 100=0.26540, 500=0.19658, 1000=0.16709, 2500=0.15726, 5000=0.14744 (USD)", RoHS=Yes, Stock 1=78878, Supplier 1=Digi-Key, Termination=SMD/SMT, Thickness=0.055inch, Voltage Rating (DC)=10V, Weight=0.000335oz, Width=1.25mm
C10 C17: library part VJ0805Y474JXJTW1BC, "Multilayer Ceramic Capacitors MLCC - SMD/SMT 0805 0.47uF 16volts X7R 5%", Capacitance=470nF, Case/Package=0805, Case Code (Metric)=2012, Dielectric=X7R, Dielectric Material=Tantalum, Manufacturer 1="Vishay Vitramon", Max Operating Temperature=125°C, Min Operating Temperature=-55°C, Package Quantity=3000, Supplier Part Number 1=720-1774-1-ND, Tolerance=5%, Voltage Rating (DC)=16V, Case Code (Imperial)=0805, ComponentLink1Description=https://datasheet.ciiva.com/11490/vjw1bcbascomseries-11490678.pdf?src-supplier=Avnet, ComponentLink1URL=https://datasheet.ciiva.com/11490/vjw1bcbascomseries-11490678.pdf?src-supplier=Avnet, ComponentLink2Description=https://datasheet.ciiva.com/5427/vjw1bcbascomseries-223529-5427159.pdf?src-supplier=Mouser, ComponentLink2URL=https://datasheet.ciiva.com/5427/vjw1bcbascomseries-223529-5427159.pdf?src-supplier=Mouser, Depth=1.25mm, Height=1.45mm, Lead Free="Lead Free", Length=2mm, Manufacturer Part Number 1=VJ0805Y474JXJTW1BC, Mount="Surface Mount", Packaging="Tape and Reel", Pricing 1="1=0.39000, 10=0.27000, 100=0.16180, 500=0.12132, 1000=0.10245 (USD)", RoHS=Yes, Stock 1=1897, Supplier 1=Digi-Key, Termination=SMD/SMT, Width=1.25mm
C21: library part 04025C562JAT2A, "Multilayer Ceramic Capacitors MLCC - SMD/SMT 50volts 5600pF 5% C0G", Case/Package=0603, Case Code (Metric)=1608, Dielectric=C0G, Dielectric Material=Ceramic, Max Operating Temperature=125°C, Min Operating Temperature=-55°C, Package Quantity=4000, Supplier Part Number 1=478-10129-1-ND, Temperature Coefficient=30ppm/°C, Tolerance=5%, Voltage=50V, Capacitance=5.6nF, Case Code (Imperial)=0603, ComponentLink1Description=https://datasheet.ciiva.com/28608/1372242-28608633.pdf?src-supplier=Element14, ComponentLink1URL=https://datasheet.ciiva.com/28608/1372242-28608633.pdf?src-supplier=Element14, ComponentLink2Description=https://datasheet.ciiva.com/22705/40889-22705450.pdf?src-supplier=Element14, ComponentLink2URL=https://datasheet.ciiva.com/22705/40889-22705450.pdf?src-supplier=Element14, ComponentLink3Description=https://datasheet.ciiva.com/26847/getdatasheetpartid-385577-26847722.pdf?src-supplier=Verical, ComponentLink3URL=https://datasheet.ciiva.com/26847/getdatasheetpartid-385577-26847722.pdf?src-supplier=Verical, ComponentLink4Description=https://datasheet.ciiva.com/7823/40889-7823822.pdf?src-supplier=Element14, ComponentLink4URL=https://datasheet.ciiva.com/7823/40889-7823822.pdf?src-supplier=Element14, ComponentLink5Description=https://datasheet.ciiva.com/5448/kem-c1003-c0g-smd-356956-5448159.pdf?src-supplier=Mouser, ComponentLink5URL=https://datasheet.ciiva.com/5448/kem-c1003-c0g-smd-356956-5448159.pdf?src-supplier=Mouser, Depth=0.8mm, Dissipation Factor=0.1%, Height=0.8mm, Lead Free="Lead Free", Length=1.6mm, Mount="Surface Mount", Number of Pins=2, Packaging="Tape and Reel", Radiation Hardening=No, REACH SVHC="No SVHC", RoHS=Yes, Supplier 1=Digi-Key, Termination=SMD/SMT, Thickness=0.034inch, Voltage Rating=50V, Voltage Rating (DC)=50V, Width=0.031inch
C23: library part 04025C391JAT2A, "CAP CER 390PF 50V C0G/NP0 0603", Case/Package=0603, Case Code (Metric)=1608, Dielectric=C0G, Dielectric Material=Ceramic, Max Operating Temperature=125°C, Min Operating Temperature=-55°C, Package Quantity=1, Supplier Part Number 1=478-5269-1-ND, Temperature Coefficient=30ppm/°C, Tolerance=5%, Voltage=50V, Capacitance=390pF, Case Code (Imperial)=0603, ComponentLink1Description=https://datasheet.ciiva.com/144/docfinderpartnumber-c0603c391j5gactu-144833.pdf?src-supplier=Digi-Key, ComponentLink1URL=https://datasheet.ciiva.com/144/docfinderpartnumber-c0603c391j5gactu-144833.pdf?src-supplier=Digi-Key, ComponentLink2Description=https://datasheet.ciiva.com/7823/40889-7823769.pdf?src-supplier=Element14, ComponentLink2URL=https://datasheet.ciiva.com/7823/40889-7823769.pdf?src-supplier=Element14, ComponentLink3Description=https://datasheet.ciiva.com/7823/40889-7823770.pdf?src-supplier=Element14, ComponentLink3URL=https://datasheet.ciiva.com/7823/40889-7823770.pdf?src-supplier=Element14, ComponentLink4Description=https://datasheet.ciiva.com/5415/kem-c1003-c0g-smd-356956-5415640.pdf?src-supplier=Mouser, ComponentLink4URL=https://datasheet.ciiva.com/5415/kem-c1003-c0g-smd-356956-5415640.pdf?src-supplier=Mouser, ComponentLink5Description=https://datasheet.ciiva.com/18102/getdatasheetpartid-77374-18102795.pdf?src-supplier=Verical, ComponentLink5URL=https://datasheet.ciiva.com/18102/getdatasheetpartid-77374-18102795.pdf?src-supplier=Verical, ComponentLink6Description=https://datasheet.ciiva.com/18219/getdatasheetpartid-385544-18219227.pdf?src-supplier=Verical, ComponentLink6URL=https://datasheet.ciiva.com/18219/getdatasheetpartid-385544-18219227.pdf?src-supplier=Verical, Depth=0.8mm, Dissipation Factor=0.1%, Height=0.8mm, Lead Free="Lead Free", Lead Pitch=0.7mm, Length=1.6mm, Mount="Surface Mount,PCB", Number of Pins=2, Packaging="Tape and Reel", Radiation Hardening=No, REACH SVHC="No SVHC", RoHS=Yes, Supplier 1=Digi-Key, Termination=SMD/SMT, Thickness=0.034inch, Voltage Rating=50V, Voltage Rating (DC)=50V, Width=0.8mm
C24 C28 C29: library part GRM155R71A104JA01D, "0402 0.1 uF 10 V ±5% Tolerance X7R SMT Multilayer Ceramic Capacitor", Capacitance=100nF, Case/Package=0402, Case Code (Metric)=1005, Dielectric=X7R, Manufacturer 1=Murata, Max Operating Temperature=125°C, Min Operating Temperature=-55°C, Package Quantity=10000, Supplier Part Number 1=490-10777-1-ND, Tolerance=5%, Voltage Rating=10V, Case Code (Imperial)=0402, ComponentLink1Description=https://datasheet.ciiva.com/5411/product-5411135.pdf?src-supplier=Mouser, ComponentLink1URL=https://datasheet.ciiva.com/5411/product-5411135.pdf?src-supplier=Mouser, ComponentLink2Description=https://datasheet.ciiva.com/11618/c02e-11618821.pdf?src-supplier=Avnet, ComponentLink2URL=https://datasheet.ciiva.com/11618/c02e-11618821.pdf?src-supplier=Avnet, Depth=0.5mm, Height=0.5mm, Lead Free="Lead Free", Length=1mm, Manufacturer Part Number 1=GRM155R71A104JA01D, Mount="Surface Mount", Packaging="Tape and Reel", Pricing 1="1=0.10000, 10=0.02800, 100=0.01240, 500=0.00886, 1000=0.00696, 2500=0.00632, 5000=0.00582 (USD)", Radiation Hardening=No, RoHS=Yes, Stock 1=1113659, Supplier 1=Digi-Key, Termination=SMD/SMT, Thickness=0.022inch, Voltage Rating (DC)=10V, Width=0.02inch
C30 C31: library part 06035A190FAT2A, "Multilayer Ceramic Capacitors MLCC - SMD/SMT 50V 18pF C0G 0603 1% Tol", Capacitance=36pF, Case/Package=0603, Case Code (Metric)=1608, Dielectric=C0G, Max Operating Temperature=125°C, Min Operating Temperature=-55°C, Package Quantity=8000, Supplier Part Number 1=478-10293-1-ND, Tolerance=1%, Voltage Rating=50V, Case Code (Imperial)=0603, ComponentLink1Description=https://datasheet.ciiva.com/11567/ccog-11567927.pdf?src-supplier=Avnet, ComponentLink1URL=https://datasheet.ciiva.com/11567/ccog-11567927.pdf?src-supplier=Avnet, ComponentLink2Description=https://datasheet.ciiva.com/5423/ccog-243403-5423289.pdf?src-supplier=Mouser, ComponentLink2URL=https://datasheet.ciiva.com/5423/ccog-243403-5423289.pdf?src-supplier=Mouser, ComponentLink3Description=https://datasheet.ciiva.com/17492/ccog-17492554.pdf?src-supplier=Avnet+Europe, ComponentLink3URL=https://datasheet.ciiva.com/17492/ccog-17492554.pdf?src-supplier=Avnet+Europe, ComponentLink4Description=https://datasheet.ciiva.com/209/ccog-209692.pdf?src-supplier=Digi-Key, ComponentLink4URL=https://datasheet.ciiva.com/209/ccog-209692.pdf?src-supplier=Digi-Key, Depth=0.81mm, Length=1.6mm, Mount="Surface Mount", Packaging="Tape and Reel", Radiation Hardening=No, RoHS=Yes, Supplier 1=Digi-Key, Termination=SMD/SMT, Thickness=0.035inch, Voltage Rating (DC)=50V, Width=0.81mm
C35: library part C1608X5R1A226M080AC, "CAP CER 22UF 10V X5R 0603", Capacitance=10uF, Case/Package=0603, Case Code (Metric)=1608, Dielectric=X5R, Dielectric Material=Ceramic, Manufacturer 1=TDK, Max Operating Temperature=85°C, Min Operating Temperature=-55°C, Package Quantity=1, Supplier Part Number 1=445-9077-6-ND, Tolerance=20%, Voltage Rating=25V, Case Code (Imperial)=0603, ComponentLink1Description=http://components.arrow.com/part/dataview/0323_06887183?src-supplier=Arrow+Europe, ComponentLink1URL=http://components.arrow.com/part/dataview/0323_06887183?src-supplier=Arrow+Europe, ComponentLink2Description=http://www.farnell.com/datasheets/2792994.pdf?src-supplier=Farnell, ComponentLink2URL=http://www.farnell.com/datasheets/2792994.pdf?src-supplier=Farnell, ComponentLink3Description=http://www.farnell.com/datasheets/2291921.pdf?src-supplier=Avnet, ComponentLink3URL=http://www.farnell.com/datasheets/2291921.pdf?src-supplier=Avnet, ComponentLink4Description=http://www.farnell.com/datasheets/2792994.pdf?src-supplier=Newark, ComponentLink4URL=http://www.farnell.com/datasheets/2792994.pdf?src-supplier=Newark, ComponentLink5Description=http://www.farnell.com/datasheets/2291921.pdf?src-supplier=Newark, ComponentLink5URL=http://www.farnell.com/datasheets/2291921.pdf?src-supplier=Newark, ComponentLink6Description=http://www.farnell.com/datasheets/2792994.pdf?src-supplier=Element14, ComponentLink6URL=http://www.farnell.com/datasheets/2792994.pdf?src-supplier=Element14, ComponentLink7Description=http://www.farnell.com/datasheets/1913358.pdf?src-supplier=Element14, ComponentLink7URL=http://www.farnell.com/datasheets/1913358.pdf?src-supplier=Element14, ComponentLink8Description=https://product.tdk.com/info/en/catalog/datasheets/mlcc_commercial_general_en.pdf?src-supplier=Digi-Key, ComponentLink8URL=https://product.tdk.com/info/en/catalog/datasheets/mlcc_commercial_general_en.pdf?src-supplier=Digi-Key, ComponentLink9Description=http://www.farnell.com/datasheets/2291921.pdf?src-supplier=RSComponents, ComponentLink9URL=http://www.farnell.com/datasheets/2291921.pdf?src-supplier=RSComponents, ComponentLink10Description=http://www.farnell.com/datasheets/2291921.pdf?src-supplier=Verical, ComponentLink10URL=http://www.farnell.com/datasheets/2291921.pdf?src-supplier=Verical, ComponentLink11Description=http://www.farnell.com/datasheets/2291921.pdf?src-supplier=Mouser, ComponentLink11URL=http://www.farnell.com/datasheets/2291921.pdf?src-supplier=Mouser, ComponentLink12Description=http://www.farnell.com/datasheets/2291921.pdf?src-supplier=Quest, ComponentLink12URL=http://www.farnell.com/datasheets/2291921.pdf?src-supplier=Quest, ComponentLink13Description=http://www.farnell.com/datasheets/2291921.pdf?src-supplier=TTI, ComponentLink13URL=http://www.farnell.com/datasheets/2291921.pdf?src-supplier=TTI, ComponentLink14Description=https://datasheet.ciiva.com/6274/tdkmlcccaprange-6274859.pdf?src-supplier=Digi-Key, ComponentLink14URL=https://datasheet.ciiva.com/6274/tdkmlcccaprange-6274859.pdf?src-supplier=Digi-Key, ComponentLink15Description=https://datasheet.ciiva.com/6274/tdkmlcccaprange-6274860.pdf?src-supplier=Digi-Key, ComponentLink15URL=https://datasheet.ciiva.com/6274/tdkmlcccaprange-6274860.pdf?src-supplier=Digi-Key, ComponentLink16Description=https://datasheet.ciiva.com/6274/tdkmlcccaprange-6274861.pdf?src-supplier=Digi-Key, ComponentLink16URL=https://datasheet.ciiva.com/6274/tdkmlcccaprange-6274861.pdf?src-supplier=Digi-Key, ComponentLink17Description=https://datasheet.ciiva.com/24216/mlcc-commercial-general-en-24216575.pdf?src-supplier=Mouser, ComponentLink17URL=https://datasheet.ciiva.com/24216/mlcc-commercial-general-en-24216575.pdf?src-supplier=Mouser, Composition=Ceramic, Depth=0.8mm, Height=0.8mm, Lead Free="Lead Free", Length=1.6mm, Manufacturer Part Number 1=C1608X5R1A226M080AC, Mount="Surface Mount", Packaging="Tape and Reel", Pricing 1="1=0.50000, 10=0.35100, 100=0.23120, 500=0.17122, 1000=0.14554 (USD)", REACH SVHC="No SVHC", RoHS=Yes, Stock 1=310014, Supplier 1=Digi-Key, Termination=SMD/SMT, Thickness=0.039inch, Voltage Rating (DC)=25V, Weight=7.1E-05oz, Width=0.8mm
C36: library part C1608X5R1E106M080AC, "CAP CER 10UF 25V X5R 0603", Case/Package=0603, Case Code (Metric)=1608, Dielectric=X5R, Dielectric Material=Ceramic, Manufacturer 1=TDK, Max Operating Temperature=85°C, Min Operating Temperature=-55°C, Package Quantity=1, Supplier Part Number 1=445-9015-1-ND, Tolerance=20%, Voltage Rating=25V, Capacitance=10uF, Case Code (Imperial)=0603, ComponentLink1Description=http://components.arrow.com/part/dataview/0323_06887183?src-supplier=Arrow+Europe, ComponentLink1URL=http://components.arrow.com/part/dataview/0323_06887183?src-supplier=Arrow+Europe, ComponentLink2Description=http://www.farnell.com/datasheets/2792994.pdf?src-supplier=Farnell, ComponentLink2URL=http://www.farnell.com/datasheets/2792994.pdf?src-supplier=Farnell, ComponentLink3Description=http://www.farnell.com/datasheets/2291921.pdf?src-supplier=Avnet, ComponentLink3URL=http://www.farnell.com/datasheets/2291921.pdf?src-supplier=Avnet, ComponentLink4Description=http://www.farnell.com/datasheets/2792994.pdf?src-supplier=Newark, ComponentLink4URL=http://www.farnell.com/datasheets/2792994.pdf?src-supplier=Newark, ComponentLink5Description=http://www.farnell.com/datasheets/2291921.pdf?src-supplier=Newark, ComponentLink5URL=http://www.farnell.com/datasheets/2291921.pdf?src-supplier=Newark, ComponentLink6Description=http://www.farnell.com/datasheets/2792994.pdf?src-supplier=Element14, ComponentLink6URL=http://www.farnell.com/datasheets/2792994.pdf?src-supplier=Element14, ComponentLink7Description=http://www.farnell.com/datasheets/1913358.pdf?src-supplier=Element14, ComponentLink7URL=http://www.farnell.com/datasheets/1913358.pdf?src-supplier=Element14, ComponentLink8Description=https://product.tdk.com/info/en/catalog/datasheets/mlcc_commercial_general_en.pdf?src-supplier=Digi-Key, ComponentLink8URL=https://product.tdk.com/info/en/catalog/datasheets/mlcc_commercial_general_en.pdf?src-supplier=Digi-Key, ComponentLink9Description=http://www.farnell.com/datasheets/2291921.pdf?src-supplier=RSComponents, ComponentLink9URL=http://www.farnell.com/datasheets/2291921.pdf?src-supplier=RSComponents, ComponentLink10Description=http://www.farnell.com/datasheets/2291921.pdf?src-supplier=Verical, ComponentLink10URL=http://www.farnell.com/datasheets/2291921.pdf?src-supplier=Verical, ComponentLink11Description=http://www.farnell.com/datasheets/2291921.pdf?src-supplier=Mouser, ComponentLink11URL=http://www.farnell.com/datasheets/2291921.pdf?src-supplier=Mouser, ComponentLink12Description=http://www.farnell.com/datasheets/2291921.pdf?src-supplier=Quest, ComponentLink12URL=http://www.farnell.com/datasheets/2291921.pdf?src-supplier=Quest, ComponentLink13Description=http://www.farnell.com/datasheets/2291921.pdf?src-supplier=TTI, ComponentLink13URL=http://www.farnell.com/datasheets/2291921.pdf?src-supplier=TTI, Composition=Ceramic, Depth=0.8mm, Height=0.8mm, Lead Free="Lead Free", Length=1.6mm, Manufacturer Part Number 1=C1608X5R1E106M080AC, Mount="Surface Mount", Packaging="Tape and Reel", Pricing 1="1=0.84000, 10=0.62000, 100=0.42500, 500=0.33650, 1000=0.28336 (USD)", REACH SVHC="No SVHC", RoHS=Yes, Stock 1=307531, Supplier 1=Digi-Key, Termination=SMD/SMT, Thickness=0.039inch, Voltage Rating (DC)=25V, Weight=7.1E-05oz, Width=0.8mm
C37: library part GRM155R71C104KA88D, "CAP CER 0.1UF 16V X7R 0402", Capacitance=10uF, Case/Package=0603, Case Code (Metric)=1608, Dielectric=X5R, Dielectric Material=Ceramic, Max Operating Temperature=85°C, Min Operating Temperature=-55°C, Package Quantity=1, Supplier Part Number 1=490-3261-6-ND, Tolerance=20%, Voltage Rating=25V, Case Code (Imperial)=0603, ComponentLink1Description=http://components.arrow.com/part/dataview/0323_06887183?src-supplier=Arrow+Europe, ComponentLink1URL=http://components.arrow.com/part/dataview/0323_06887183?src-supplier=Arrow+Europe, ComponentLink2Description=http://www.farnell.com/datasheets/2792994.pdf?src-supplier=Farnell, ComponentLink2URL=http://www.farnell.com/datasheets/2792994.pdf?src-supplier=Farnell, ComponentLink3Description=http://www.farnell.com/datasheets/2291921.pdf?src-supplier=Avnet, ComponentLink3URL=http://www.farnell.com/datasheets/2291921.pdf?src-supplier=Avnet, ComponentLink4Description=http://www.farnell.com/datasheets/2792994.pdf?src-supplier=Newark, ComponentLink4URL=http://www.farnell.com/datasheets/2792994.pdf?src-supplier=Newark, ComponentLink5Description=http://www.farnell.com/datasheets/2291921.pdf?src-supplier=Newark, ComponentLink5URL=http://www.farnell.com/datasheets/2291921.pdf?src-supplier=Newark, ComponentLink6Description=http://www.farnell.com/datasheets/2792994.pdf?src-supplier=Element14, ComponentLink6URL=http://www.farnell.com/datasheets/2792994.pdf?src-supplier=Element14, ComponentLink7Description=http://www.farnell.com/datasheets/1913358.pdf?src-supplier=Element14, ComponentLink7URL=http://www.farnell.com/datasheets/1913358.pdf?src-supplier=Element14, ComponentLink8Description=https://product.tdk.com/info/en/catalog/datasheets/mlcc_commercial_general_en.pdf?src-supplier=Digi-Key, ComponentLink8URL=https://product.tdk.com/info/en/catalog/datasheets/mlcc_commercial_general_en.pdf?src-supplier=Digi-Key, ComponentLink9Description=http://www.farnell.com/datasheets/2291921.pdf?src-supplier=RSComponents, ComponentLink9URL=http://www.farnell.com/datasheets/2291921.pdf?src-supplier=RSComponents, ComponentLink10Description=http://www.farnell.com/datasheets/2291921.pdf?src-supplier=Verical, ComponentLink10URL=http://www.farnell.com/datasheets/2291921.pdf?src-supplier=Verical, ComponentLink11Description=http://www.farnell.com/datasheets/2291921.pdf?src-supplier=Mouser, ComponentLink11URL=http://www.farnell.com/datasheets/2291921.pdf?src-supplier=Mouser, ComponentLink12Description=http://www.farnell.com/datasheets/2291921.pdf?src-supplier=Quest, ComponentLink12URL=http://www.farnell.com/datasheets/2291921.pdf?src-supplier=Quest, ComponentLink13Description=http://www.farnell.com/datasheets/2291921.pdf?src-supplier=TTI, ComponentLink13URL=http://www.farnell.com/datasheets/2291921.pdf?src-supplier=TTI, Composition=Ceramic, Depth=0.8mm, Height=0.8mm, Lead Free="Lead Free", Length=1.6mm, Mount="Surface Mount", Packaging="Tape and Reel", REACH SVHC="No SVHC", RoHS=Yes, Supplier 1=Digi-Key, Termination=SMD/SMT, Thickness=0.039inch, Voltage Rating (DC)=25V, Weight=7.1E-05oz, Width=0.8mm
C38: library part GRM1555C1E621JA01D, "CAP CER 620PF 25V C0G/NP0 0402", Capacitance=10uF, Case/Package=0603, Case Code (Metric)=1608, Dielectric=X5R, Dielectric Material=Ceramic, Max Operating Temperature=85°C, Min Operating Temperature=-55°C, Package Quantity=1, Supplier Part Number 1=490-6181-1-ND, Tolerance=20%, Voltage Rating=25V, Case Code (Imperial)=0603, ComponentLink1Description=http://components.arrow.com/part/dataview/0323_06887183?src-supplier=Arrow+Europe, ComponentLink1URL=http://components.arrow.com/part/dataview/0323_06887183?src-supplier=Arrow+Europe, ComponentLink2Description=http://www.farnell.com/datasheets/2792994.pdf?src-supplier=Farnell, ComponentLink2URL=http://www.farnell.com/datasheets/2792994.pdf?src-supplier=Farnell, ComponentLink3Description=http://www.farnell.com/datasheets/2291921.pdf?src-supplier=Avnet, ComponentLink3URL=http://www.farnell.com/datasheets/2291921.pdf?src-supplier=Avnet, ComponentLink4Description=http://www.farnell.com/datasheets/2792994.pdf?src-supplier=Newark, ComponentLink4URL=http://www.farnell.com/datasheets/2792994.pdf?src-supplier=Newark, ComponentLink5Description=http://www.farnell.com/datasheets/2291921.pdf?src-supplier=Newark, ComponentLink5URL=http://www.farnell.com/datasheets/2291921.pdf?src-supplier=Newark, ComponentLink6Description=http://www.farnell.com/datasheets/2792994.pdf?src-supplier=Element14, ComponentLink6URL=http://www.farnell.com/datasheets/2792994.pdf?src-supplier=Element14, ComponentLink7Description=http://www.farnell.com/datasheets/1913358.pdf?src-supplier=Element14, ComponentLink7URL=http://www.farnell.com/datasheets/1913358.pdf?src-supplier=Element14, ComponentLink8Description=https://product.tdk.com/info/en/catalog/datasheets/mlcc_commercial_general_en.pdf?src-supplier=Digi-Key, ComponentLink8URL=https://product.tdk.com/info/en/catalog/datasheets/mlcc_commercial_general_en.pdf?src-supplier=Digi-Key, ComponentLink9Description=http://www.farnell.com/datasheets/2291921.pdf?src-supplier=RSComponents, ComponentLink9URL=http://www.farnell.com/datasheets/2291921.pdf?src-supplier=RSComponents, ComponentLink10Description=http://www.farnell.com/datasheets/2291921.pdf?src-supplier=Verical, ComponentLink10URL=http://www.farnell.com/datasheets/2291921.pdf?src-supplier=Verical, ComponentLink11Description=http://www.farnell.com/datasheets/2291921.pdf?src-supplier=Mouser, ComponentLink11URL=http://www.farnell.com/datasheets/2291921.pdf?src-supplier=Mouser, ComponentLink12Description=http://www.farnell.com/datasheets/2291921.pdf?src-supplier=Quest, ComponentLink12URL=http://www.farnell.com/datasheets/2291921.pdf?src-supplier=Quest, ComponentLink13Description=http://www.farnell.com/datasheets/2291921.pdf?src-supplier=TTI, ComponentLink13URL=http://www.farnell.com/datasheets/2291921.pdf?src-supplier=TTI, Composition=Ceramic, Depth=0.8mm, Height=0.8mm, Lead Free="Lead Free", Length=1.6mm, Mount="Surface Mount", Packaging="Tape and Reel", REACH SVHC="No SVHC", RoHS=Yes, Supplier 1=Digi-Key, Termination=SMD/SMT, Thickness=0.039inch, Voltage Rating (DC)=25V, Weight=7.1E-05oz, Width=0.8mm